# EAGLE board clapclap2313 (EAGLE 6.3)
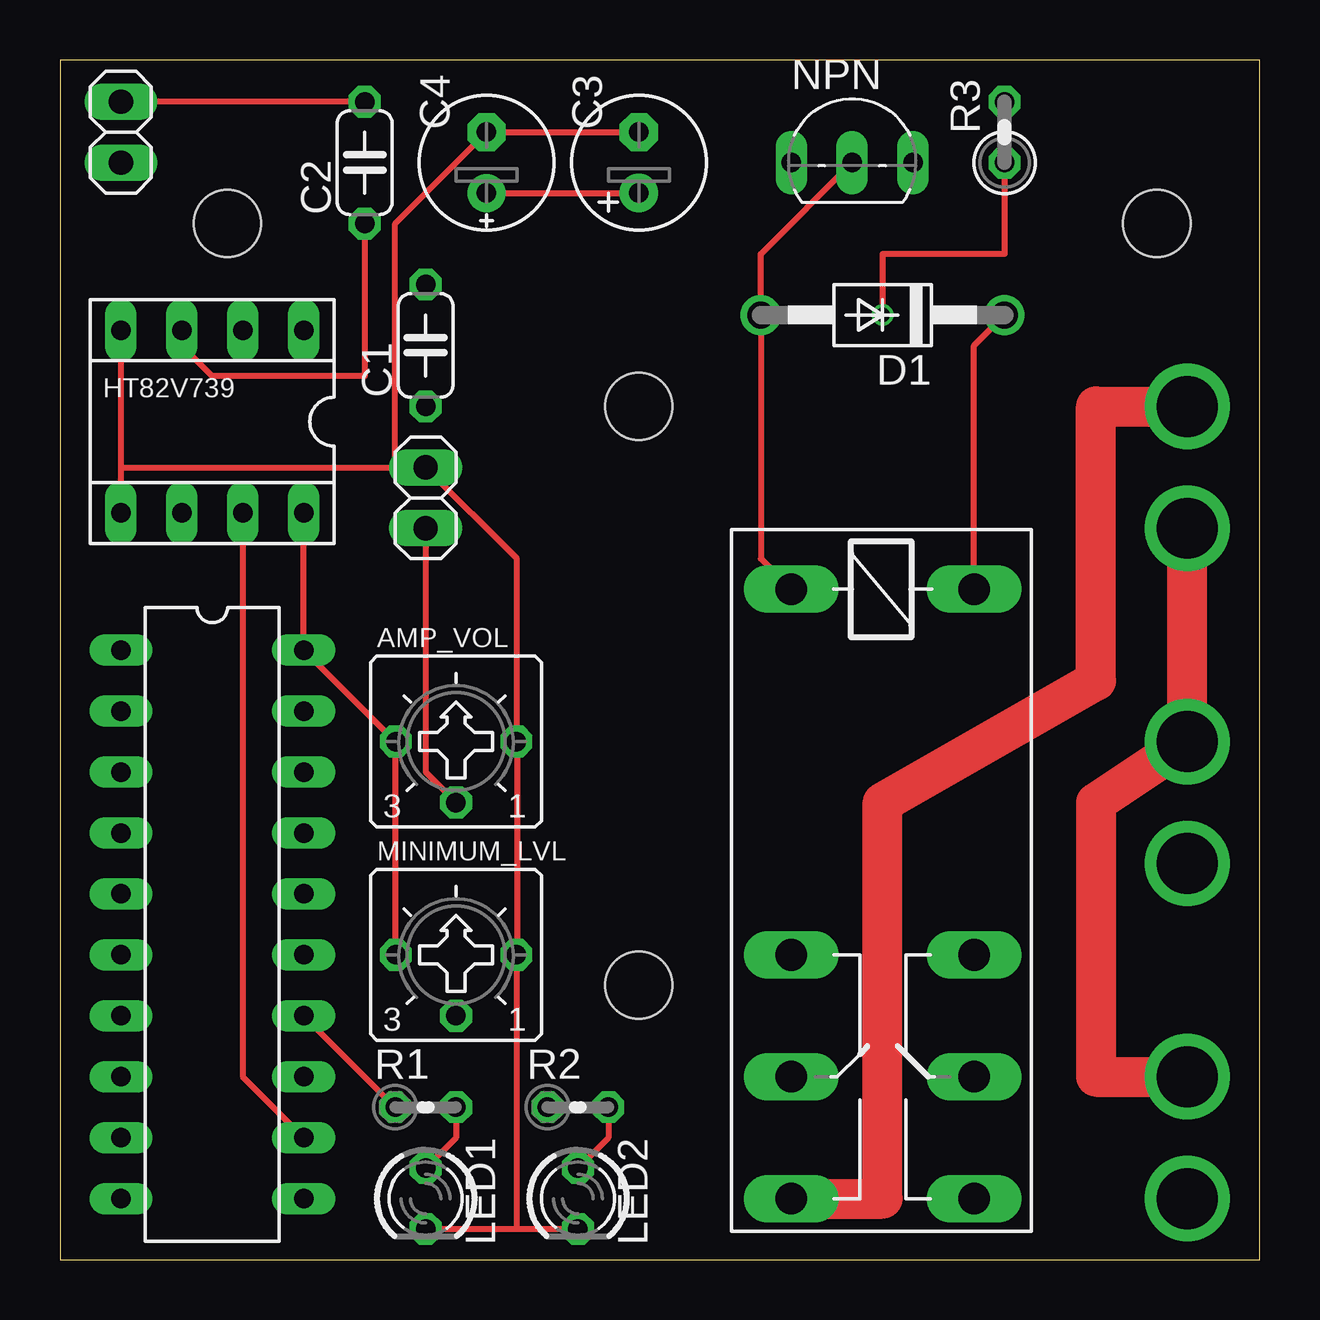
[diagram p0: board, top side]
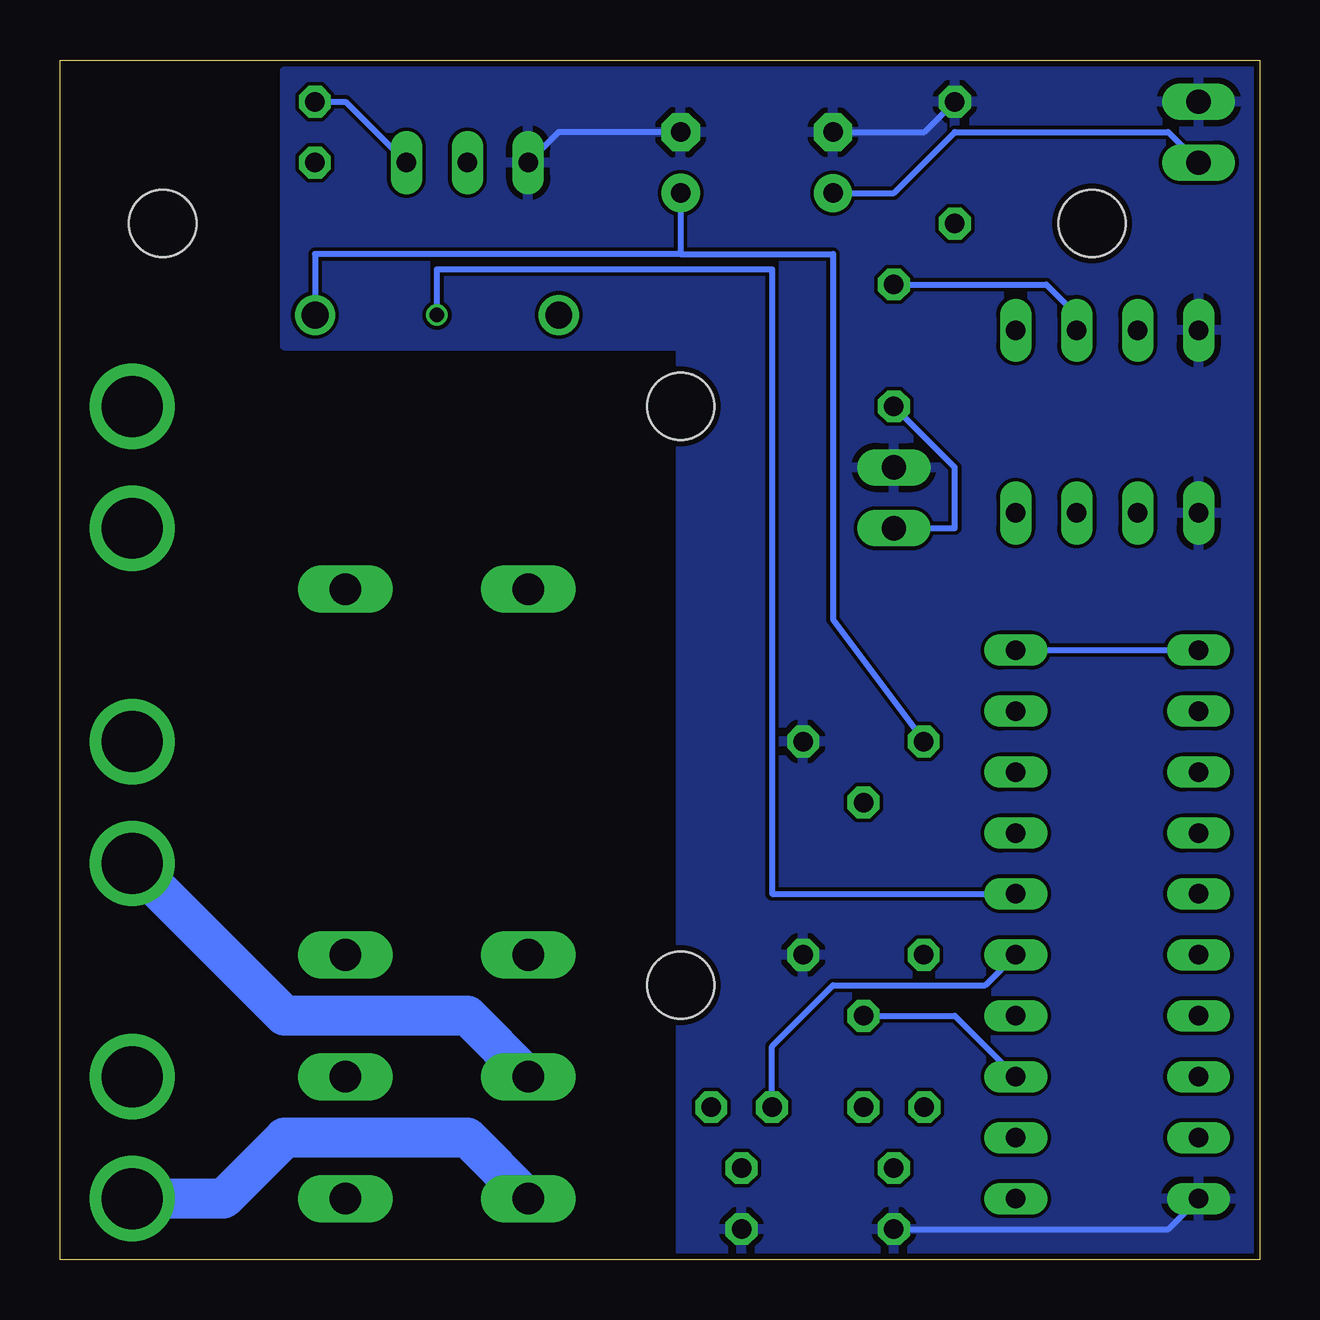
[diagram p1: board, bottom side, seen from below]

Size 50 x 50 mm. Coordinates in mm from the lower left corner, seen from the top.
Outline: 0,0 50,0 50,50 0,50 0,0
Copper layers (1*16): Top 0.035mm / dielectric 1.5mm / Bottom 0.035mm
Design rules "default": minimum track width 6mil, minimum drill 12mil, track to track 6mil, track to pad 6mil, pad to pad 6mil, via to via 6mil, smd to smd 0mil, copper to edge 10mil, drill to drill 10mil, minimum pad ring 10mil, minimum via ring 6mil, stop-mask expansion 2mil, vias tented up to drill 100mil, thermal gap 10mil
Holes 2.8 mm at 6.99,43.18 45.72,43.18 24.13,11.43 24.13,35.56

## Footprints (pad centres in the part's own frame; a part is rotated, then mirrored left to right if it is on the bottom)
PAD_0.1000 = drill 2.54 pad 2.54: 1 0,0
CT6 = drill 0.813 octagon: A 2.515,0; E -2.515,0; S 0,-2.54
DIL20 = drill 0.813 long: 1 -11.43,-3.81; 2 -8.89,-3.81; 3 -6.35,-3.81; 4 -3.81,-3.81; 5 -1.27,-3.81; 6 1.27,-3.81; 7 3.81,-3.81; 8 6.35,-3.81; 9 8.89,-3.81; 10 11.43,-3.81; 11 11.43,3.81; 12 8.89,3.81; 13 6.35,3.81; 14 3.81,3.81; 15 1.27,3.81; 16 -1.27,3.81; 17 -3.81,3.81; 18 -6.35,3.81; 19 -8.89,3.81; 20 -11.43,3.81
C050-024X044 = drill 0.813 octagon: 1 -2.54,0; 2 2.54,0
E2,5-6 = drill 0.813 pad 1.6: + -1.27,0 | drill 0.813 pad 1.6 octagon: - 1.27,0
E2,5-6E = drill 0.813 pad 1.575: + -1.27,0 | drill 0.813 pad 1.575 octagon: - 1.27,0
DO41-10 = drill 1.118: A 5.08,0; C -5.08,0
SOCKET-08 = drill 0.813 long: 1 -3.81,-3.81; 2 -1.27,-3.81; 3 1.27,-3.81; 4 3.81,-3.81; 5 3.81,3.81; 6 1.27,3.81; 7 -1.27,3.81; 8 -3.81,3.81
F4052 = drill 1.321 long: 1 -3.81,3.81; 2 -3.81,-3.81; O1 11.43,-3.81; O2 11.43,3.81; P1 16.51,-3.81; P2 16.51,3.81; S1 21.59,-3.81; S2 21.59,3.81
LED3MM = drill 0.813 octagon: A -1.27,0; K 1.27,0
1X02 = drill 1.016 long: 1 -1.27,0; 2 1.27,0
TO92-ECB = drill 0.813 long: B 2.54,0; C 0,0; E -2.54,0
0204V = drill 0.813 octagon: 1 -1.27,0; 2 1.27,0
0207/2V = drill 0.813 octagon: 1 -1.27,0; 2 1.27,0

## Placement (x,y rotation side)
ACOUT  SPECIAL_DRILL_0.1000  [PAD_0.1000]  46.99,16.51 0 top
AMP_VOL  5k  [CT6]  16.51,21.59 0 top
ATTINY2313  AT90S2313P  [DIL20]  6.35,13.97 270 top
C1  1uF  [C050-024X044]  15.24,38.1 90 top
C2  1uF  [C050-024X044]  12.7,45.72 90 top
C3  47uF  [E2,5-6]  24.13,45.72 90 top
C4  220uF  [E2,5-6E]  17.78,45.72 90 top
D1  1N4004  [DO41-10]  34.29,39.37 180 top
HT82V739  [SOCKET-08]  6.35,34.92 180 top
K1  4052  [F4052]  34.29,24.13 270 top
LED1  red  [LED3MM]  15.24,2.54 270 top
LED2  green  [LED3MM]  21.59,2.54 270 top
LIVE_IN  SPECIAL_DRILL_0.1000  [PAD_0.1000]  46.99,2.54 0 top
LIVE_WW  SPECIAL_DRILL_0.1000  [PAD_0.1000]  46.99,35.56 0 top
M1  Mic  [1X02]  15.24,31.75 90 top
MINIMUM_LVL  5k  [CT6]  16.51,12.7 0 top
NEUTRAL_IN  SPECIAL_DRILL_0.1000  [PAD_0.1000]  46.99,7.62 0 top
NEUTRAL_OUT  SPECIAL_DRILL_0.1000  [PAD_0.1000]  46.99,21.59 0 top
NEUTRAL_WW  SPECIAL_DRILL_0.1000  [PAD_0.1000]  46.99,30.48 0 top
NPN  2SC2120  [TO92-ECB]  33.02,45.72 0 top
POWER  5v  [1X02]  2.54,46.99 90 top
R1  470  [0204V]  15.24,6.35 0 top
R2  470  [0204V]  21.59,6.35 0 top
R3  1k  [0207/2V]  39.37,46.99 90 top

## Library data of the parts
ACOUT LIVE_IN LIVE_WW NEUTRAL_IN NEUTRAL_OUT NEUTRAL_WW = special-drill
AMP_VOL MINIMUM_LVL = pot
ATTINY2313 = atmel; OC_FARNELL: unknown; OC_NEWARK: unknown
C1-C3 R1-R3 = resistor
C4 = rcl
D1 = diode
HT82V739 = ic-package
K1 = relay; OC_FARNELL: unknown; OC_NEWARK: unknown
LED1 LED2 = led
M1 POWER = pinhead
NPN = transistor

## Nets
ACIN: K1.S1 LIVE_IN.1 LIVE_WW.1
ACOUT: ACOUT.1 K1.P1
GND: AMP_VOL.A ATTINY2313.10 C2.2 C3.- C4.- HT82V739.4 HT82V739.5 LED1.K LED2.K M1.2 MINIMUM_LVL.A NPN.E POWER.2
N$1: C2.1 HT82V739.3
N$2: ATTINY2313.16 R3.1
N$3: AMP_VOL.S C1.1 M1.1
N$4: ATTINY2313.14 R1.1
N$5: C1.2 HT82V739.2
N$6: ATTINY2313.15 R2.1
N$7: LED1.A R1.2
N$8: NPN.B R3.2
N$9: D1.A K1.2 NPN.C
N$10: ATTINY2313.12 HT82V739.7
N$11: LED2.A R2.2
N$12: ATTINY2313.13 MINIMUM_LVL.S
N$13: NEUTRAL_IN.1 NEUTRAL_OUT.1 NEUTRAL_WW.1
VCC: AMP_VOL.E ATTINY2313.1 ATTINY2313.20 C3.+ C4.+ D1.C HT82V739.8 K1.1 MINIMUM_LVL.E POWER.1

## Tracks (layer width: path | path; a pad name or v marks a point on that pad's centre or on a via)
ACIN
  Top 1.676: K1.S1 34.29,2.54 34.29,19.05 43.18,24.13 43.18,35.56 LIVE_WW.1
  Bottom 1.676: K1.S1 33.02,5.08 40.64,5.08 43.18,2.54 LIVE_IN.1
ACOUT
  Bottom 1.676: ACOUT.1 40.64,10.16 33.02,10.16 K1.P1
GND
  Top 0.254: C2.2 POWER.2 | C3.- C4.- 13.97,43.18 13.97,33.02 | HT82V739.4 2.54,33.02 | 2.54,33.02 HT82V739.5 | 2.54,33.02 13.97,33.02 | 19.05,21.59 19.05,12.7 | LED2.K 19.05,1.27 | 19.05,1.27 LED1.K | 19.05,1.27 19.05,12.7 | 19.05,12.7 MINIMUM_LVL.A | 19.05,21.59 19.05,29.21 M1.2 13.97,33.02 | 19.05,21.59 AMP_VOL.A
  Bottom 0.254: NPN.E 29.21,46.99 C3.- | C2.2 13.97,46.99 C4.- | ATTINY2313.10 3.81,1.27 LED1.K
  pour Bottom: 0,49.53 40.64,49.53 40.64,38.1 24.13,38.1 24.13,0 0,0
N$1
  Top 0.254: C2.1 12.7,36.83 6.35,36.83 5.08,38.1 HT82V739.3
N$2  (via drill 0.6)
  Top 0.254: R3.1 39.37,41.91 34.29,41.91 v34.29,39.37
  Bottom 0.254: ATTINY2313.16 20.32,15.24 20.32,40.64 20.32,41.27 34.29,41.27 v34.29,39.37
N$3
  Top 0.254: AMP_VOL.S 15.24,20.32 M1.1
  Bottom 0.254: C1.1 12.7,33.02 12.7,30.48 M1.1
N$4
  Top 0.254: ATTINY2313.14 R1.1
N$5
  Bottom 0.254: C1.2 8.89,40.64 7.62,39.37 HT82V739.2
N$6
  Bottom 0.254: ATTINY2313.15 11.43,11.43 17.78,11.43 20.32,8.89 R2.1
N$7
  Top 0.254: LED1.A 16.51,5.08 R1.2
N$8
  Bottom 0.254: NPN.B 38.1,48.26 R3.2
N$9
  Top 0.254: NPN.C 29.21,41.91 D1.A 29.21,29.21 K1.2
N$10
  Top 0.254: ATTINY2313.12 7.62,7.62 HT82V739.7
N$11
  Top 0.254: LED2.A 22.86,5.08 R2.2
N$12
  Bottom 0.254: ATTINY2313.13 12.7,10.16 MINIMUM_LVL.S
N$13
  Top 1.676: NEUTRAL_IN.1 43.18,7.62 43.18,19.05 NEUTRAL_OUT.1 NEUTRAL_WW.1
VCC
  Top 0.254: 13.97,21.59 13.97,12.7 MINIMUM_LVL.E | HT82V739.8 ATTINY2313.20 13.97,21.59 | 13.97,21.59 AMP_VOL.E | D1.C 38.1,38.1 K1.1 | C4.+ C3.+
  Bottom 0.254: ATTINY2313.20 ATTINY2313.1 | POWER.1 3.81,46.99 12.7,46.99 15.24,44.45 C4.+ | D1.C 39.37,41.91 24.13,41.91 | C3.+ 24.13,41.91 | 24.13,41.91 17.78,41.91 17.78,26.67 13.97,21.59 AMP_VOL.E

## Text on the board
Document: GND | Order# | 44200 | +5v | E C B | L | - | Micro | + | Wallwart | N | N | v1.2 - Feb2012 | Clapclap 2313 | Output | L | N | ATTINY2313 | + | + | Input | http://kalshagar.wikispaces.com/Clapclap+2313 | - | -